# Altium PCB MUX.PcbDoc
Units mil, origin at the board's own origin, x right, y up, seen from the top; angles counter-clockwise.
Board outline 3595 x 2080 mil, 2 copper layers (Top Layer, Bottom Layer), stack 61.811 mil thick; 3 components, 11 nets, 28 pads, 2 vias.
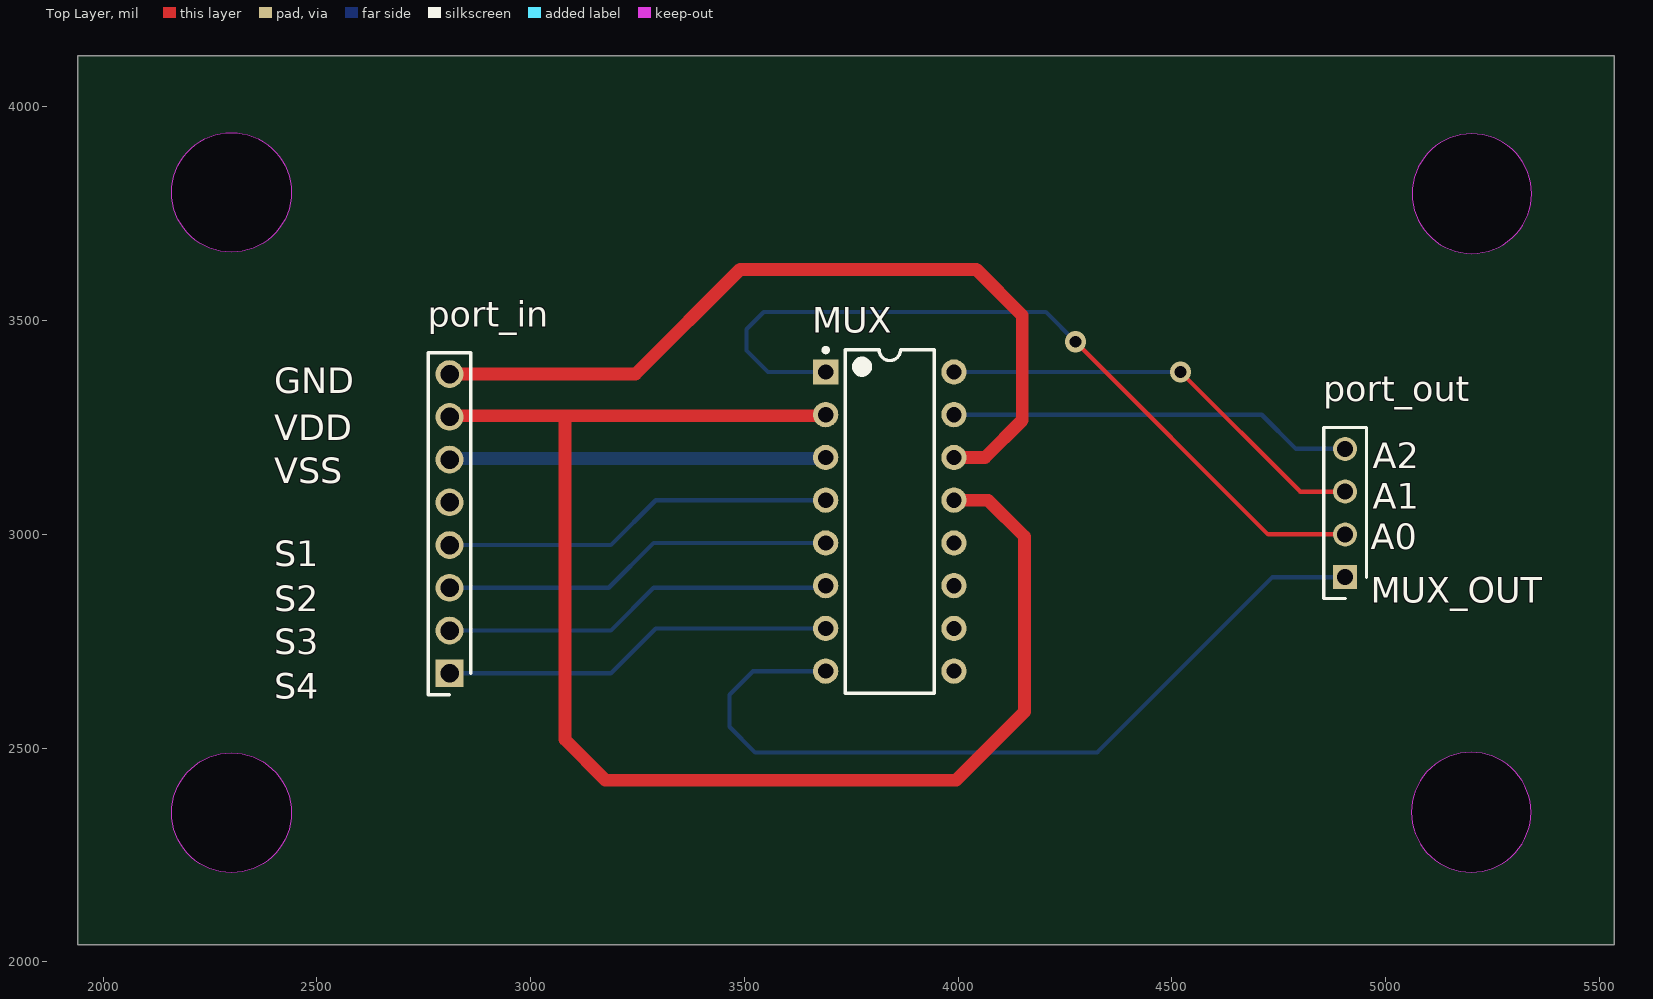
[diagram p0: Top Layer view]
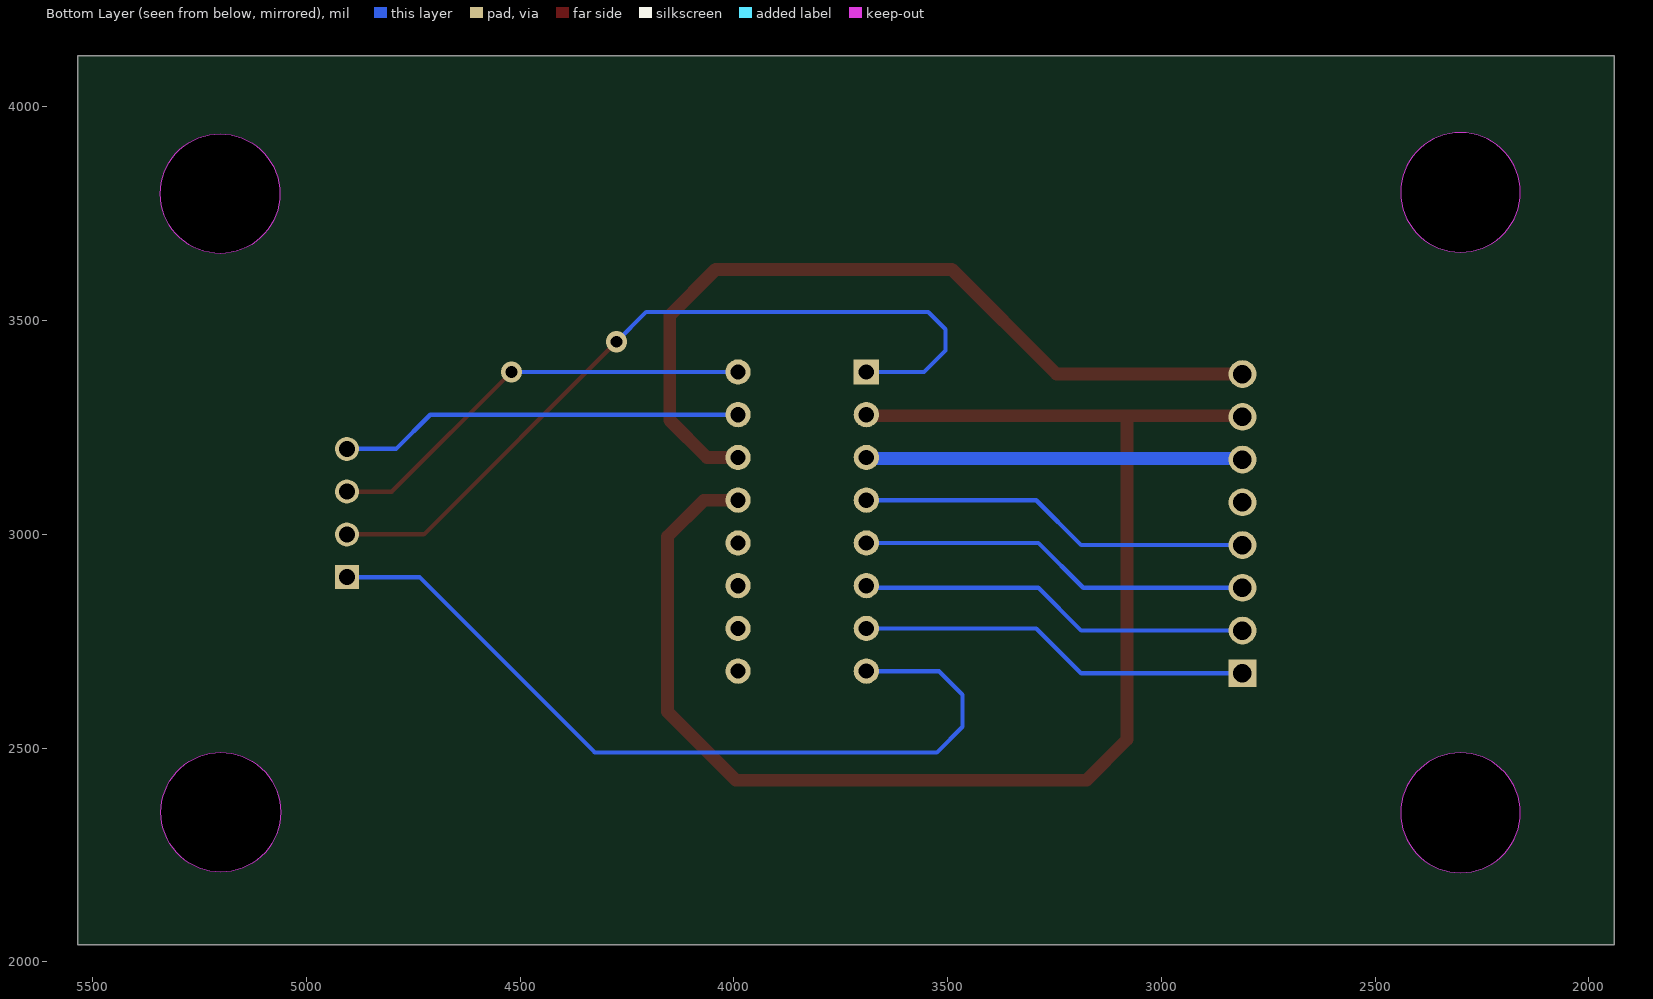
[diagram p1: Bottom Layer view, seen from below]

## Layer stack, top to bottom
Top Solder: solder mask 0.5, SM-001, Dk 3.8
Top Layer: signal copper 1.378
Dielectric 1: dielectric 59.055, FR-4, Dk 4.5
Bottom Layer: signal copper 1.378
Bottom Solder: solder mask 0.5, SM-001, Dk 3.8

## Board outline
1940,2040 1940,4120 5535,4120 5535,2040
cut-out: 5061.66,3797.05 ccw(c5201.66,3797.05) 5201.66,3657.05 ccw(c5201.66,3797.05) 5341.66,3797.05 ccw(c5201.66,3797.05) 5201.66,3937.05 ccw(c5201.66,3797.05)
cut-out: 5060,2350 ccw(c5200,2350) 5200,2210 ccw(c5200,2350) 5340,2350 ccw(c5200,2350) 5200,2490 ccw(c5200,2350)
cut-out: 2300,2208.76 cw(c2300,2348.76) 2160,2348.76 cw(c2300,2348.76) 2300,2488.76 cw(c2300,2348.76) 2440,2348.76 cw(c2300,2348.76)
cut-out: 2300,3660 cw(c2300,3800) 2160,3800 cw(c2300,3800) 2300,3940 cw(c2300,3800) 2440,3800 cw(c2300,3800)

## Design rules (kind name [scope] priority, off if disabled: settings)
Clearance [All] p1: gap=10 ignorepadtopadclearanceinfootprint=FALSE
PolygonConnect [All] p1: connectstyle=Relief reliefconductorwidth=10 reliefentries=4 polygonreliefangle="90 Angle" airgapwidth=10
RoutingVias [All] p1: holewidth=28 width=50 viastyle="Through Hole" minholewidth=28 minwidth=50 maxholewidth=28 maxwidth=50
SolderMaskExpansion [All] p1: expansion=4 istentingtop=FALSE
SupplyNets "Schematic Supply Nets_2" [InNet('VDD')] p1: voltage=0.000
SupplyNets "Schematic Supply Nets_1" [InNet('VSS')] p2: voltage=0.000
SupplyNets "Schematic Supply Nets" [InNet('GND')] p3: voltage=0.000
UnRoutedNet [All] p1: checkbadconnections=TRUE
Width [All] p1: maxlimit=30 minlimit=10 preferedwidth=10 minimp=50.000000 maximp=50.000000 favimp=50.000000
29 further rules are at their usual default settings.

## Components (designator, comment, footprint, x,y, rotation, side; value= is the part's Value field where it differs from the comment)
MUX "ADG508AKNZ" ADI-N-16 3840,3030 r0 top
port_in "929870-01-08-RA" RHDR8W64P0X254_1X8_2032X254X380P 2810,2675 r90 top (schematic designator port1)
port_out "929870-01-04-RA" RHDR4W76P0X254_1X4_1016X254X826P 4905,2900 r90 top (schematic designator port2)

## Footprints (in the part's own frame and the unit in brackets; to place one, negate y for a bottom-side part, rotate by r counter-clockwise, add the part's x,y. Pads: shape width x height; smd on the part's side, far side on the other; paste and mask are expansions set on the pad)
ADI-N-16 [mm] "DIP, 16-Leads, Body 20.07x6.6mm, Pitch 2.54mm"
  rect 1.5x1.5 hole 0.9: 1(-3.81,8.89)
  round 1.5 hole 0.9: 2(-3.81,6.35) 3(-3.81,3.81) 4(-3.81,1.27) 5(-3.81,-1.27) 6(-3.81,-3.81) 7(-3.81,-6.35) 8(-3.81,-8.89) 9(3.81,-8.89) 10(3.81,-6.35) 11(3.81,-3.81) 12(3.81,-1.27) 13(3.81,1.27) 14(3.81,3.81) 15(3.81,6.35) 16(3.81,8.89)
  silkscreen extent -3.93,-10.2 2.65,10.31, body extent -3.95,-10.15 3.95,10.15, height 5.33
RHDR4W76P0X254_1X4_1016X254X826P [mm]
  rect 1.425x1.425 hole 0.95: 1(0,0)
  round 1.425 hole 0.95: 2(2.54,0) 3(5.08,0) 4(7.62,0)
  silkscreen extent -1.27,-1.27 8.89,1.27, body extent -1.27,-1.27 8.89,1.27, height 8.26
RHDR8W64P0X254_1X8_2032X254X380P [mm]
  rect 1.65x1.65 hole 1.1: 1(0,0)
  round 1.65 hole 1.1: 2(2.54,0) 3(5.08,0) 4(7.62,0) 5(10.16,0) 6(12.7,0) 7(15.24,0) 8(17.78,0)
  silkscreen extent -1.27,-1.27 19.05,1.27, body extent 0,0 0,0

## Part data
MUX: library part CMP-0793-00029-1, "CMOS 8-Channel Analog Multiplexer, 280 Ohm / 500 Ohm Ron, 16-pin DIP (N-16), Tube", Manufacturer="Analog Devices", Code_JEDEC=MS-001, ComponentLink1Description="Manufacturer URL", ComponentLink1URL=http://www.analog.com/en/index.html, ComponentLink2Description=Datasheet, ComponentLink2URL=http://www.analog.com/static/imported-files/data_sheets/ADG508A_509A.pdf, ComponentLink3Description="Package Specification", ComponentLink3URL=http://www.analog.com/static/imported-files/packages/44768431550332N_16.pdf, DatasheetVersion="Rev. D", Max Analog Signal Range="Vss to Vdd", Mounting Technology="Through Hole", PackageDescription="16-Pin Plastic Dual In-Line Package, Row spacing 7.62 mm, Pitch 2.54 mm", PackageReference=N-16, PackageVersion="070706-A, 07/2006", Packing=Tube, PartNumber=ADG508AKNZ, Ron (ohms)=280, t transition (s)=200n
port_in: "Connector", Manufacturer_Name=3M, Mouser Part Number=517-929870-01-08-RA, Arrow Part Number=929870-01-08-RA, Arrow Price/Stock=https://www.arrow.com/en/products/929870-01-08-ra/3m?utm_currency=USD&region=nac, Datasheet Link=https://componentsearchengine.com/Datasheets/2/929870-01-08-RA.pdf, Height=3.8mm, Manufacturer_Part_Number=929870-01-08-RA, Mouser Price/Stock=https://www.mouser.co.uk/ProductDetail/3M-Electronic-Solutions-Division/929870-01-08-RA?qs=neFkstNq%252B6FsuK7vJEiMKg%3D%3D
port_out: "Connector", Manufacturer_Name=3M, Mouser Part Number=517-929870-01-04-RA, Arrow Part Number=929870-01-04-RA, Arrow Price/Stock=https://www.arrow.com/en/products/929870-01-04-ra/3m, Datasheet Link=https://componentsearchengine.com/Datasheets/2/929870-01-04-RA.pdf, Height=8.26mm, Manufacturer_Part_Number=929870-01-04-RA, Mouser Price/Stock=https://www.mouser.co.uk/ProductDetail/3M-Electronic-Solutions-Division/929870-01-04-RA?qs=neFkstNq%252B6GPZEKactAgTg%3D%3D

## Via types
v1: diameter 50, hole 28, Top Layer to Bottom Layer, 2 vias

## Nets (pads, with @x,y where several pads share a name; then routed paths per layer and width w, separated by ;. In a path a pad name is that pad's centre, name@x,y a point inside that pad or via, vN(x,y) a via of type N, cw(c..) or ccw(c..) an arc to the next point about the centre after c; other vN are vias at no path point)
GND: MUX.14 port_in.8 | length 1927.3
  Top Layer w30: port_in.8 3245,3375 3490,3620 4042.05,3620 4150,3512.05 4150,3267.05 4062.95,3180 MUX.14
NetMUX_1: MUX.1 port_out.2 | length 1887.7
  Top Layer w10: v1(4274.4,3450.6) 4725,3000 port_out.2
  Bottom Layer w10: MUX.1 3555,3380 3505,3430 3505,3480 3545,3520 4205,3520 v1(4274.4,3450.6)
NetMUX_4: MUX.4 port_in.4 | length 923.5
  Bottom Layer w10: port_in.4 3187.46,2975 3292.46,3080 MUX.4
NetMUX_5: MUX.5 port_in.3 | length 923.5
  Bottom Layer w10: port_in.3 3182.46,2875 3287.46,2980 MUX.5
NetMUX_6: MUX.6 port_in.2 | length 923.5
  Bottom Layer w10: port_in.2 3187.46,2775 3287.46,2875 3685,2875 MUX.6
NetMUX_7: MUX.7 port_in.1 | length 923.5
  Bottom Layer w10: port_in.1 3187.46,2675 3292.46,2780 MUX.7
NetMUX_8: MUX.8 port_out.1 | length 1957.5
  Bottom Layer w10: MUX.8 3520,2680 3465,2625 3465,2550 3525,2490 4325,2490 4735,2900 port_out.1
NetMUX_15: MUX.15 port_out.4 | length 948.1
  Bottom Layer w10: MUX.15 4710,3280 4790,3200 port_out.4
NetMUX_16: MUX.16 port_out.3 | length 1031
  Top Layer w10: v1(4520,3380) 4800,3100 port_out.3
  Bottom Layer w10: MUX.16 v1(4520,3380)
VDD: MUX.2 MUX.13 port_in.7 | length 3434.5
  Top Layer w10: port_in.7 port_in.7@2812.5,3277.5 ; 3070,3277.5 3080,3267.5 ; MUX.2@3687.5,3277.5 MUX.2
  Top Layer w30: port_in.7@2812.5,3277.5 3070,3277.5 MUX.2@3687.5,3277.5 ; 3080,3267.5 3080,2520 3175,2425 3995,2425 4155,2585 4155,2995 4070,3080 MUX.13
VSS: MUX.3 port_in.6 | length 882.1
  Top Layer w10: port_in.6 port_in.6@2812.5,3177.5 ; MUX.3@3687.5,3177.5 MUX.3
  Bottom Layer w30: port_in.6@2812.5,3177.5 MUX.3@3687.5,3177.5
pads on no net: MUX.9 MUX.10 MUX.11 MUX.12 port_in.5

## Silkscreen, mask and mechanical layers (free items; w line width, h text height)
Top Overlay:
  text "GND" at 2400,3330 h60
  text "VDD" at 2400,3220 h60
  text "A2" at 4970,3155 h60
  text "VSS" at 2400,3120 h60
  text "A1" at 4970,3060 h60
  text "A0" at 4965,2965 h60
  text "S1" at 2400,2925 h60
  text "MUX_OUT" at 4965,2840 h60
  text "S2" at 2400,2820 h60
  text "S3" at 2400,2720 h60
  text "S4" at 2400,2615 h60
Mechanical 1:
  circle w10: c2300,2350 r140
  circle w10: c2300,3800 r140
  circle w10: c5200,2350 r140
  circle w10: c5200,3800 r140
  lines w10: 1940,2040 5535,2040 5535,4120 1940,4120 1940,2040